# Altium PCB 走马灯PCB.PcbDoc
Units mil, origin at the board's own origin, x right, y up, seen from the top; angles counter-clockwise.
Board outline 3795.25 x 1812.03 mil, 2 copper layers (Top Layer, Bottom Layer); 29 components, 23 nets, 97 pads, 0 vias.
Unrouted connection lines stored in the file: 12.
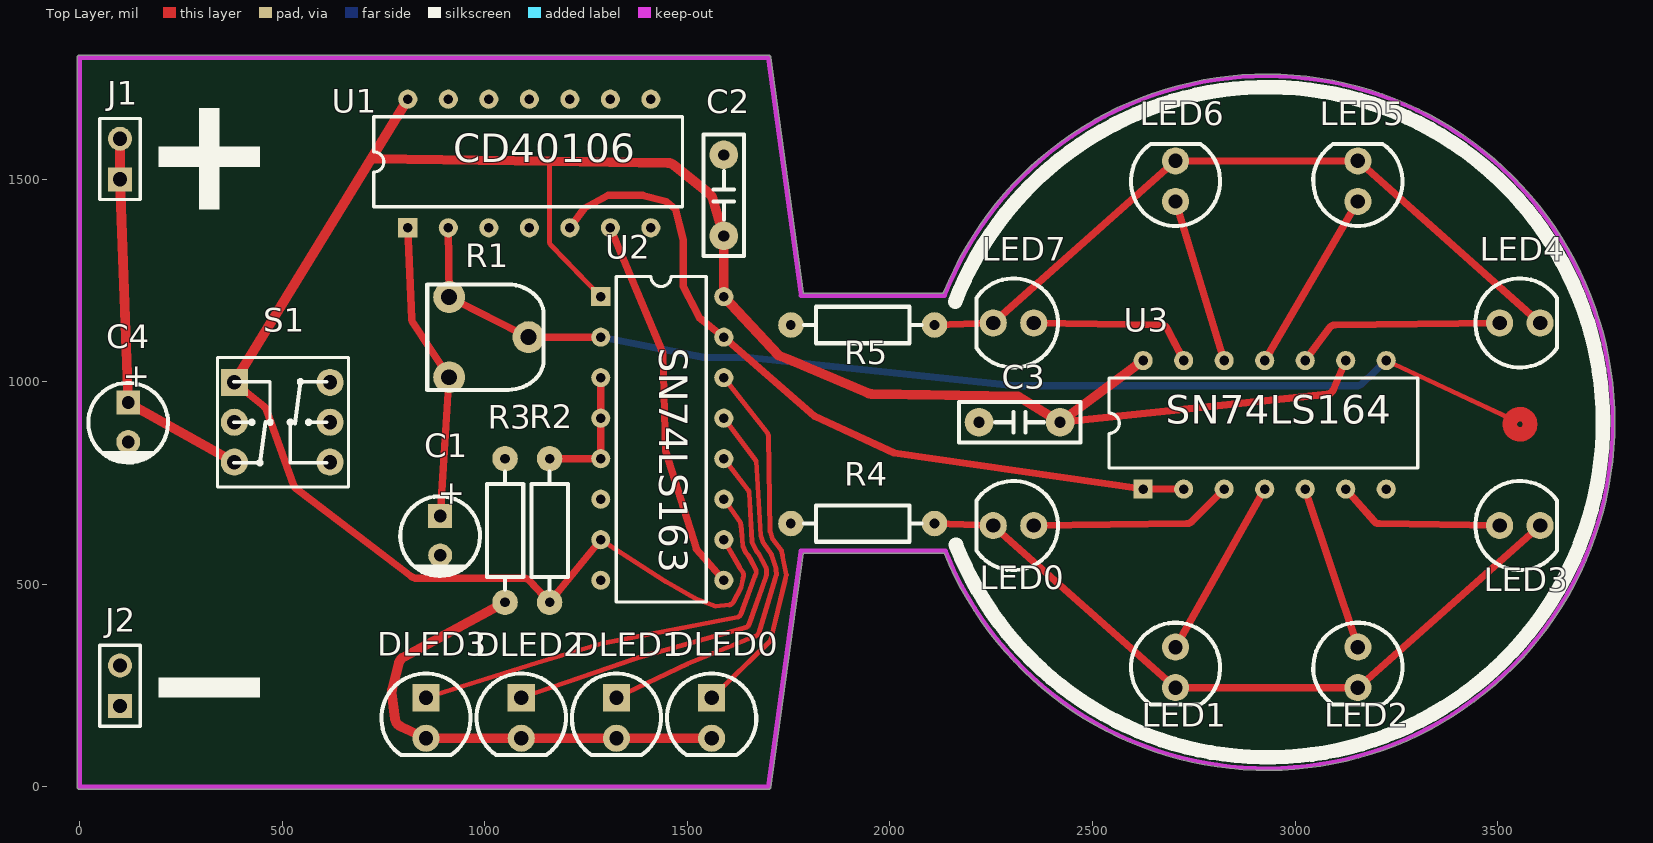
[diagram p0: Top Layer view]
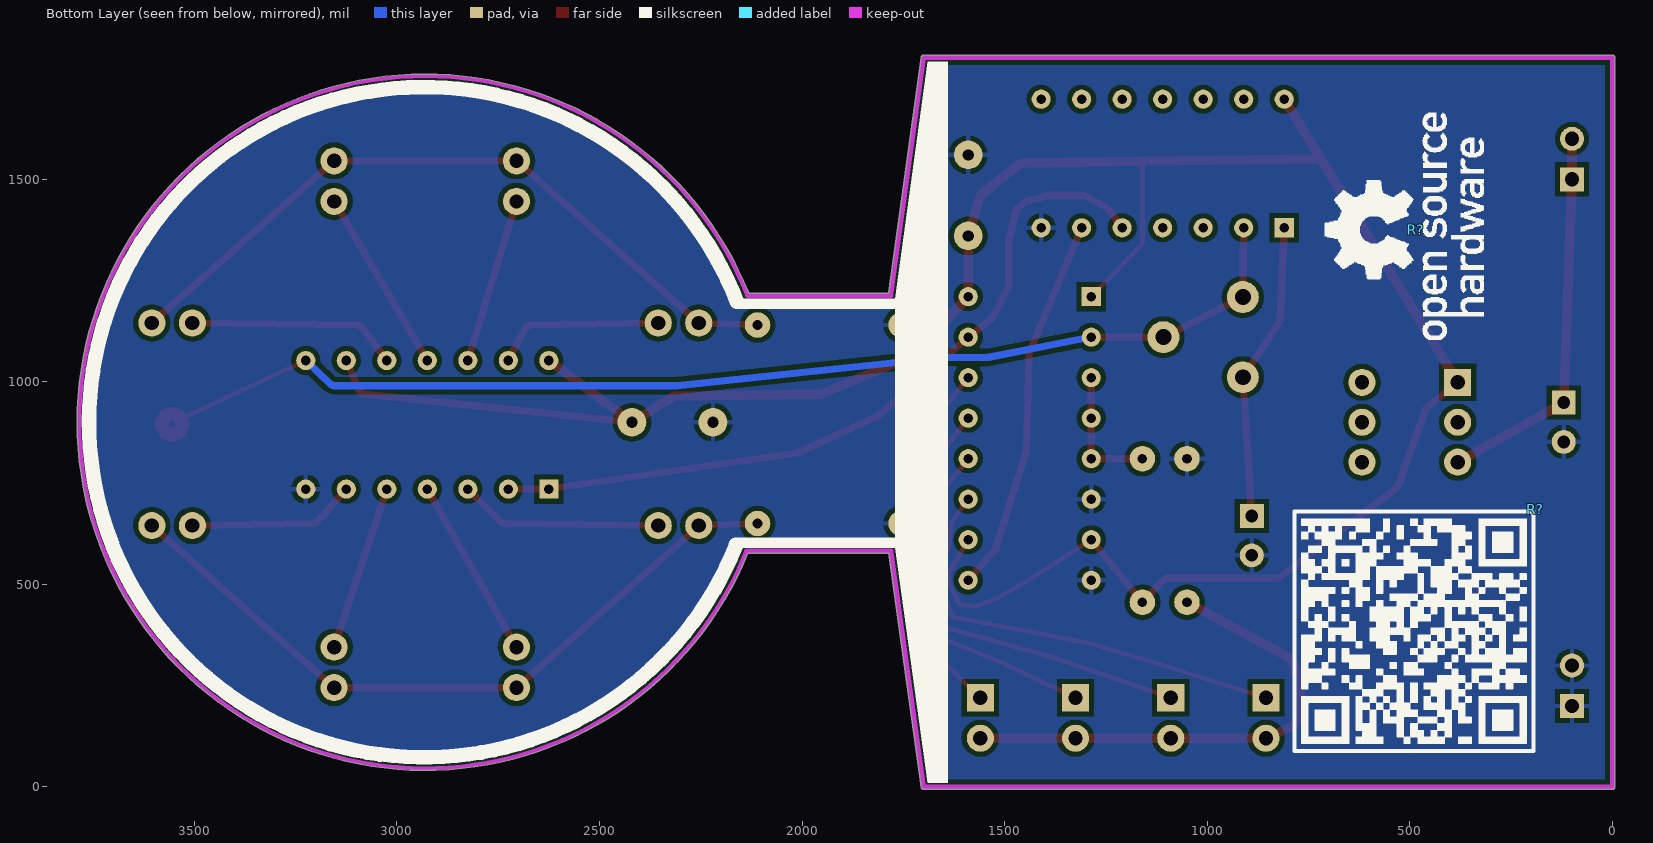
[diagram p1: Bottom Layer view, seen from below]
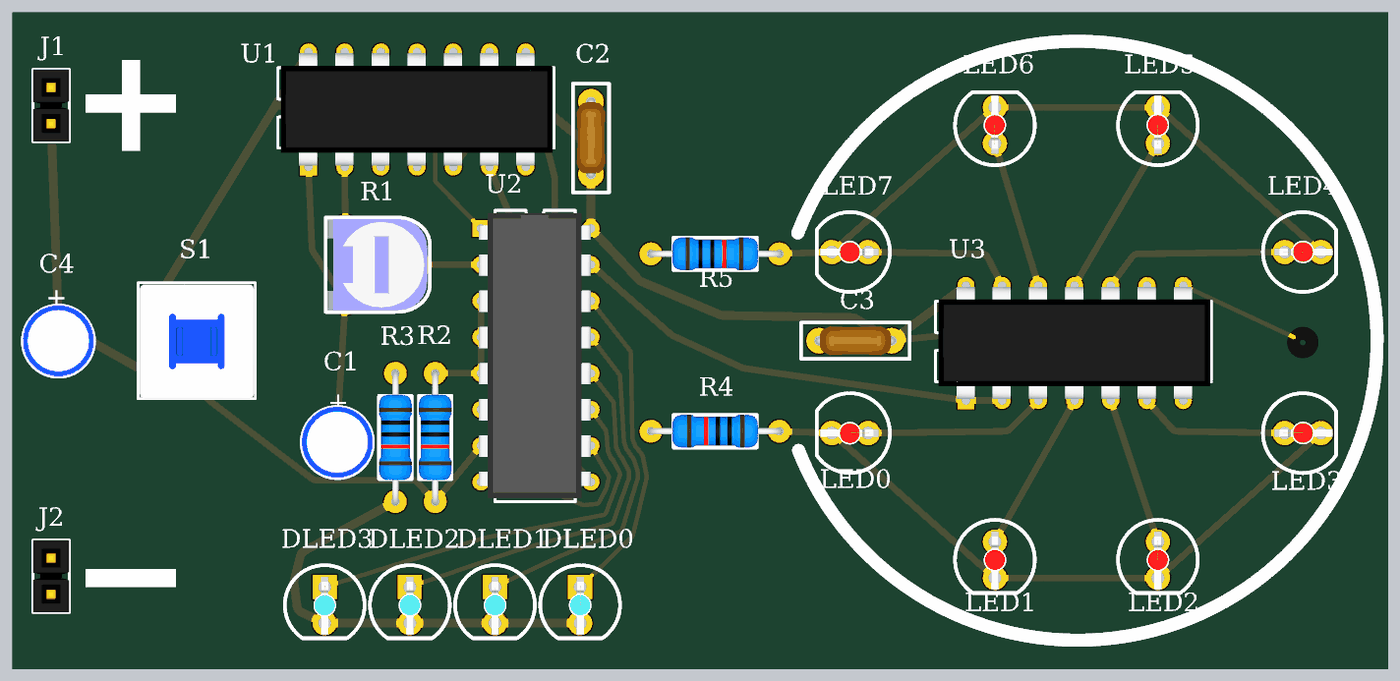
[diagram p2: 3D render of the assembled board from above, using the file's embedded part models]

## Layer stack, top to bottom
Top Solder: solder mask 0.4, Solder Resist, Dk 3.5
Top Layer: signal copper 1.4
Dielectric 1: dielectric 12.6, FR-4, Dk 4.8
Bottom Layer: signal copper 1.4
Bottom Solder: solder mask 0.4, Solder Resist, Dk 3.5

## Board outline
-6.01,0 ccw(c0,0) 0,-6.01 1700,-6.01 ccw(c1700,0) 1705.96,-0.82 1785.62,576.73 2133.89,576.73 ccw(c2930,900) 3789.24,900 ccw(c2930,900) 2132.15,1218.95 1785.92,1218.95 ccw(c1780,1220) 1786.02,1220 ccw(c1780,1220) 1785.96,1220.82 1705.96,1800.82 ccw(c1700,1800) 1700,1806.01 0,1806.01 ccw(c0,1800) -6.01,1800

## Design rules (kind name [scope] priority, off if disabled: settings)
AssemblyTestPointUsage [All] p1 off:
AssemblyTestpoint [All] p1 off: testpointundercomponent=TRUE minsize=40 maxsize=100 preferedsize=60 minholesize=0 maxholesize=40 preferedholesize=32 testpointgrid=1 usegrid=TRUE gridtolerance=0.01 allowsidetop=TRUE allowsidebottom=TRUE
Clearance [All] p1: gap=12 ignorepadtopadclearanceinfootprint=TRUE except(0: Arc-Text Track-Text SMDPad-Text THPad-Text Via-Text Fill-Text Poly-Text Region-Text Text-Text; 10: Arc-Arc Arc-Track Track-Track)
ComponentClearance [All] p1 off: gap=10 collisioncheckmode=3 verticalgap=10 showdistances=FALSE
FabricationTestPointUsage [All] p1 off: valid=0 allowmultiple=FALSE
FabricationTestpoint [All] p1 off: side=3 testpointundercomponent=TRUE minsize=40 maxsize=100 preferedsize=60 minholesize=0 maxholesize=40 preferedholesize=32 testpointgrid=1 allowsidetop=TRUE allowsidebottom=TRUE usegrid=TRUE gridtolerance=0.01
Height [All] p1 off: minheight=0 maxheight=1000 prefheight=500
HoleToHoleClearance [All] p1 off: gap=10 allowstackedmicrovias=TRUE
LayerPairs [All] p1 off: enforce=TRUE
MinimumSolderMaskSliver [All] p1 off: minsoldermaskwidth=10
NetAntennae [All] p1 off: netantennaetolerance=0
PasteMaskExpansion [All] p1 off: expansion=0
PolygonConnect [All] p1: connectstyle=Relief reliefconductorwidth=12 reliefentries=4 polygonreliefangle="90 Angle" airgapwidth=12
RoutingVias [All] p1: holewidth=28 width=50 viastyle="Through Hole" minholewidth=28 minwidth=50 maxholewidth=28 maxwidth=50
SilkToSilkClearance [All] p1 off: silktosilkclearance=10
SilkToSolderMaskClearance [IsPad] p1 off: minsilkscreentomaskgap=10 clearancetoexposedcopper=TRUE
SolderMaskExpansion [All] p1 off: expansion=4 istentingtop=FALSE
Width [All] p1: maxlimit=36 minlimit=12 preferedwidth=18
17 further rules are at their usual default settings.

## Classes and differential pairs
component class 走马灯SCH: C1 C2 C3 C4 DLED0 DLED1 DLED2 DLED3 J1 J2 LED0 LED1 LED2 LED3 LED4 LED5 LED6 LED7 R1 R2 R3 R4 R5 S1 U1 U2 U3

## Components (designator, comment, footprint, x,y, rotation, side; value= is the part's Value field where it differs from the comment)
C1 "1u/2.2u/10u" C5X8 890,620 r270 top
C2 "100n" MLCC5.08-A 1590,1460 r270 top
C3 "100n" MLCC5.08-A 2320,900 r0 top
C4 "1u/2.2u/10u" C5X8 120,900 r270 top
DLED0 "D-LED" "LED 5MM-Y" 1560,170 r270 top
DLED1 "D-LED" "LED 5MM-Y" 1325,170 r270 top
DLED2 "D-LED" "LED 5MM-Y" 1090,170 r270 top
DLED3 "D-LED" "LED 5MM-Y" 855,170 r270 top
J1 "MHDR" HDR1X2 100,1500 r90 top
J2 "MHDR" HDR1X2 100,200 r90 top
LED0 "LED" "LED 5MM-R" 2305,645 r180 top
LED1 "LED" "LED 5MM-R" 2705,295 r270 top
LED2 "LED" "LED 5MM-R" 3155,295 r270 top
LED3 "LED" "LED 5MM-R" 3555,645 r0 top
LED4 "LED" "LED 5MM-R" 3555,1145 r0 top
LED5 "LED" "LED 5MM-R" 3155,1495 r90 top
LED6 "LED" "LED 5MM-R" 2705,1495 r90 top
LED7 "LED" "LED 5MM-R" 2305,1145 r180 top
R1 "105/504/104" "RES ADJ3" 1010,1110 r0 top
R2 "10K" "RS 1/4W" 1160,632.83 r270 top
R3 "200" "RS 1/4W" 1050,632.83 r270 top
R4 "200" "RS 1/4W" 1932.83,650 r180 top
R5 "200" "RS 1/4W" 1932.83,1140 r0 top
R? "Comment" "OPEN SOURCE" 485,1375 r90 bottom locked
R? "Comment" "my Github" 190,685 r0 bottom locked
S1 "SW DPDT" "KFT DIP-8X8" 500,900 r270 top
U1 "40106" DIP14 810,1380 r90 top
U2 "SN74LS163A" DIP16 1286.3,1210 r0 top
U3 "SN74LS164" DIP14 2625,735 r90 top

## Footprints (in the part's own frame and the unit in brackets; to place one, negate y for a bottom-side part, rotate by r counter-clockwise, add the part's x,y. Pads: shape width x height; smd on the part's side, far side on the other; paste and mask are expansions set on the pad)
C5X8 [mm] "RB.1/.2"
  rect 1.5x1.5 hole 0.8: 1(-1.231,0)
  round 1.5 hole 0.8: 2(1.231,0)
  silkscreen extent -2.47,-2.5 2.53,2.5, body extent -2.5,-2.5 2.5,2.49, height 8.13
DIP14 [mm]
  rect 1.2x1.2 hole 0.6: 1(0,0)
  round 1.2 hole 0.6: 2(0,-2.54) 3(0,-5.08) 4(0,-7.62) 5(0,-10.16) 6(0,-12.7) 7(0,-15.24) 8(8.062,-15.24) 9(8.062,-12.7) 10(8.062,-10.16) 11(8.062,-7.62) 12(8.062,-5.08) 13(8.062,-2.54) 14(8.062,0)
  silkscreen extent 1.32,-17.22 6.96,2.13, body extent 0.1,-17.12 7.98,1.93, height 4.19
DIP16 [mm]
  rect 1.2x1.2 hole 0.6: 1(0,0)
  round 1.2 hole 0.6: 2(0,-2.54) 3(0,-5.08) 4(0,-7.62) 5(0,-10.16) 6(0,-12.7) 7(0,-15.24) 8(0,-17.78) 9(7.714,-17.78) 10(7.714,-15.24) 11(7.714,-12.7) 12(7.714,-10.16) 13(7.714,-7.62) 14(7.714,-5.08) 15(7.714,-2.54) 16(7.714,0)
  silkscreen extent 0.97,-19.15 6.61,1.27, body extent -0.17,-18.92 7.7,1.08, height 5.08
HDR1X2 [mm]
  rect 1.5x1.5 hole 0.9: 1(-0.01,0.007)
  round 1.5 hole 0.9: 2(2.53,0.007)
  silkscreen extent -1.28,-1.26 3.8,1.28, body extent -1.28,-1.26 3.8,1.28, height 8.41
"KFT DIP-8X8" [mm] "自锁开关，规格：8*8mm"
  rect 1.7x1.7 hole 0.9: 1(-2.5,-3)
  round 1.7 hole 0.9: 2(0,-3) 3(2.5,-3) 4(2.5,3) 5(0,3) 6(-2.5,3)
  silkscreen extent -4.06,-4.06 4.06,4.15, body extent -3.95,-3.95 4.05,4.05, height 13.1
"LED 5MM-R" [mm] "红色5mm直插LED  淘宝ID:黄晶宝石"
  round 1.7 hole 0.9: 1(-1.27,0) 2(1.27,0)
  silkscreen extent -2.8,-2.8 2.33,2.8, body extent -2.85,-2.85 2.45,2.85, height 8.75
"LED 5MM-Y" [mm] "黄色5mm直插LED                       淘宝ID:黄晶宝石"
  rect 1.7x1.7 hole 0.9: 1(-1.27,0)
  round 1.7 hole 0.9: 2(1.27,0)
  silkscreen extent -2.8,-2.8 2.33,2.8, body extent -2.85,-2.85 2.45,2.85, height 8.75
MLCC5.08-A [mm] "独石电容，脚距5.08mm"
  round 1.8 hole 0.7: 1(-2.54,0) 2(2.54,0)
  silkscreen extent -3.81,-1.27 3.81,1.27, body extent -2.79,-1 2.79,1, height 3.71
"my Github" [mil]
  silkscreen extent 5,5 595,596
"OPEN SOURCE" [mil]
  silkscreen extent -271,-168 289,224
"RES ADJ3" [mm]
  round 2 hole 1: 1(-2.489,-2.515) 2(2.489,0) 3(-2.489,2.515)
  silkscreen extent -3.86,-3.31 3.44,3.3, body extent -3.75,-3.2 3.25,3.2, height 7.5
"RS 1/4W" [mm] "直插色环电阻，脚距9mm，直径2.3mm"
  round 1.6 hole 0.6: 1(-4.5,0) 2(4.5,0)
  silkscreen extent -3.68,-1.14 3.68,1.14, body extent -4.72,-1.16 4.73,1.16, height 2.32

## Part data
C1 C4: library part CAP-E, "电解电容"
C2 C3: library part CAP-M, "独石电容"
DLED0 DLED1 DLED2 DLED3: "LED"
J1 J2: library part MHDR1x2, "MHDR1x2"
R1: library part R-GLIDE
R2: library part R-10K, "resistor"
R3 R4 R5: library part R-200, "resistor"
S1: "Switch", LatestRevisionDate=17-Jul-2002, LatestRevisionNote="Re-released for DXP Platform.", PackageReference=SOT23-6, Published=24-Mar-1999, Publisher="Altium Limited"
U1: library part CD40106
U2: "SYN 4-BIT CNT"
U3: "8-BIT PALL SERI SFT REG"

## Nets (pads, with @x,y where several pads share a name; then routed paths per layer and width w, separated by ;. In a path a pad name is that pad's centre, name@x,y a point inside that pad or via, vN(x,y) a via of type N, cw(c..) or ccw(c..) an arc to the next point about the centre after c; other vN are vias at no path point)
+5: C2.2 C3.2 R2.2 S1.1 U1.14 U2.1 U2.7 U2.10 U2.16 U3.9 U3.14 | length 6057.7
  Top Layer w12: 1160,1344.82 ccw(c1172,1344.87) 1163.39,1336.51 U2.1 ; 1160,1344.87 1159.99,1544.1 ; U2.7 1446.33,507.07 1517.7,466 1569.9,445.99 1603.63,449.36 ccw(c1602.46,461.31) 1613.02,455.62 1632.97,492.7 1634.46,499.55 1638.92,520.04 ccw(c1627.2,522.62) 1637.23,529.21 ; U2.10 1629.18,541.44 1637.22,529.22
  Top Layer w18: S1.1 456.07,938.19 cw(c444.75,924.19) 461.69,930.29 ; 461.7,930.27 528.2,745.01 ccw(c545.14,751.09) 534.23,736.77 820.13,518.71 ccw(c831.08,533) 831.08,515 1097.14,515 cw(c1097.14,497) 1110.33,509.25 R2.2 U2.7 ; C3.2 3079.45,968.9 ; 3079.49,968.9 ccw(c3077.58,986.8) 3094.16,979.79 U3.9
  Top Layer w24: S1.1 719.8,1550.12 ; U1.14 719.8,1550.12 ; 1451.77,1540.11 1159.99,1544.1 719.8,1550.12 ; 1451.78,1540.11 cw(c1451.44,1516.11) 1466.49,1534.81 1554.16,1464.68 ; 1554.16,1464.67 cw(c1539.16,1445.93) 1562.16,1452.8 C2.2 U2.16 1725.39,1064.94 1750.64,1054.27 1945.71,971.81 ; 1945.76,971.79 ccw(c1955.06,993.92) 1954.65,969.92 2316.22,963.86 C3.2 U3.14
CLK: R1.2 R1.3 U1.2 U2.2 U3.8 | length 3034.2
  Top Layer w12: U3.8 3530,910
  Top Layer w18: U1.2 R1.3 R1.2 U2.2
  Top Layer w36: 3580,895 ccw(c3555,895) 3580,895
  Bottom Layer w18: U2.2 1538.28,1060.34 ccw(c1541.76,1078) 1541.76,1060 1649.05,1060 cw(c1649.05,1042) 1650.97,1059.9 2309.05,990.1 ccw(c2310.95,1008) 2310.95,990 3152.76,990 ccw(c3152.76,1008) 3165.22,995.01 U3.8
GND: C1.2 C2.1 C3.1 C4.2 J2.1 J2.2 R3.1 R4.2 R5.1 U1.7 U2.6 U2.8 U3.7
NetC1_1: C1.1 R1.1 U1.1 | length 739.9
  Top Layer w18: U1.1 819.78,1154.99 819.79,1154.93 ccw(c837.77,1155.77) 822.76,1145.84 R1.1 C1.1
NetDLED0_1: DLED0.1 U2.14 | length 903.4
  Top Layer w12: DLED0.1 1702.49,357.57 ccw(c1694.15,366.21) 1705.82,363.42 1740.92,509.28 1744.32,523.39 1734.49,572.38 1732.24,583.62 1711.32,611.01 1704.29,629.99 1700.07,865.92 ccw(c1688.07,865.76) 1697.52,873.16 U2.14
NetDLED0_2: DLED0.2 DLED1.2 DLED2.2 DLED3.2 R3.2 | length 1242.8
  Top Layer w24: R3.2 799.3,320.03 ccw(c810.72,298.92) 787.44,304.74 771.09,239.35 ccw(c794.37,233.53) 770.56,230.55 778.35,168.16 ccw(c802.17,171.14) 792.02,149.4 DLED3.2 DLED2.2 DLED1.2 DLED0.2
NetDLED1_1: DLED1.1 U2.13 | length 960.3
  Top Layer w12: DLED1.1 1500.7,303.53 1669.72,372.83 ccw(c1665.17,383.94) 1676.66,380.5 1716.54,512.26 1719.79,523 1718.71,538.21 ccw(c1706.74,537.38) 1718.14,541.13 1709.57,567.06 1707.36,573.75 1687.6,601.83 1681.17,620.07 1670,805 U2.13
NetDLED2_1: DLED2.1 U2.12 | length 1039.4
  Top Layer w12: DLED2.1 1380.18,319.49 1644.02,393.33 ccw(c1640.78,404.88) 1652.09,400.87 1693.58,517.35 ccw(c1683,523.01) 1695,523.01 1695,536.95 ccw(c1683,537) 1693.6,542.63 1684.29,560.08 1676.09,575.45 1670.72,581.74 1659.45,604.97 1652.71,726.06 ccw(c1640.73,725.43) 1650.2,732.79 U2.12
NetDLED3_1: DLED3.1 U2.11 | length 1119.9
  Top Layer w12: DLED3.1 1129.61,306.24 1294.89,355.37 1623.36,418.72 ccw(c1621.09,430.5) 1632.36,426.38 1666.78,519.56 1670,528.29 1670,531.93 ccw(c1658,531.98) 1668.58,537.64 ; U2.11 1631.36,652.09 1633.42,635.1 1636.74,595.14 1644.1,577.68 1650.65,571.04 1653.91,564.97 1668.57,537.66
NetLED0_1: LED0.1 U3.3 | length 504.5
  Top Layer w18: LED0.1 2732.68,649.9 2732.73,649.91 ccw(c2732.45,667.9) 2745.18,655.18 U3.3
NetLED0_2: LED0.2 LED1.2 LED2.2 LED3.2 R4.1 | length 1799.2
  Top Layer w18: R4.1 LED0.2 LED1.2 LED2.2 LED3.2
NetLED1_1: LED1.1 U3.4 | length 447.8
  Top Layer w18: LED1.1 U3.4
NetLED2_1: LED2.1 U3.5 | length 411.1
  Top Layer w18: U3.5 LED2.1
NetLED3_1: LED3.1 U3.6 | length 417.5
  Top Layer w18: U3.6 3194.78,655.91 ccw(c3208.24,667.87) 3207.94,649.87 LED3.1
NetLED4_1: LED4.1 U3.10 | length 522.8
  Top Layer w18: U3.10 3084.68,1132.83 cw(c3099.14,1122.11) 3098.92,1140.11 LED4.1
NetLED4_2: LED4.2 LED5.2 LED6.2 LED7.2 R5.2 | length 1799.2
  Top Layer w18: R5.2 LED7.2 LED6.2 LED5.2 LED4.2
NetLED5_1: LED5.1 U3.11 | length 455
  Top Layer w18: U3.11 LED5.1
NetLED6_1: LED6.1 U3.12 | length 410.5
  Top Layer w18: LED6.1 U3.12
NetLED7_1: LED7.1 U3.13 | length 421.4
  Top Layer w18: LED7.1 2669.2,1140.17 cw(c2668.92,1122.17) 2684.96,1130.34 U3.13
NetR2_1: R2.1 U2.3 U2.4 U2.5 | length 326.3
  Top Layer w18: R2.1 U2.5 U2.4 U2.3
NetU1_5: U1.5 U2.15 U3.1 U3.2 | length 1893.3
  Top Layer w18: U1.5 1246.6,1428.8 1305,1460 1390,1460 1448.69,1444.43 1470.82,1425.98 1490,1350 1490,1235 1529.02,1158.78 U2.15 1814.15,914.77 2010.58,823.99 U3.1 U3.2
NetU1_6: U1.6 U2.9 | length 933.3
  Top Layer w18: U1.6 1438.69,1073.12 cw(c1422.09,1066.16) 1440.09,1066.56 1446,830.03 1522.14,587.55 U2.9
VIN: C4.1 J1.1 J1.2 S1.3 | length 951.8
  Top Layer w24: J1.2 J1.1 C4.1 S1.3
pads on no net: S1.2 S1.4 S1.5 S1.6 U1.3 U1.4 U1.8 U1.9 U1.10 U1.11 U1.12 U1.13

## Polygon pours and split planes (outlines as drawn)
GND on Bottom Layer "GND" (solid, remove dead copper, pour order 0): 0,1800 0,0 3785,0 3785,1800

## Keep-outs
Keep-Out Layer:
  lines w10: 2135.16,1212.93 cw(c2930,900) 2136.87,582.75
  lines w12: 1780,580 1700,0 0,0 0,1800 1700,1800 1780,1220 ; 1780,582.75 2136.87,582.75 ; 1780,1212.93 2135.16,1212.93

## Silkscreen, mask and mechanical layers (free items; w line width, h text height)
Top Overlay:
  rectangle: 195,1530 445,1580
  region: 345,1425 345,1675 295,1675 295,1425
  rectangle: 195,220 445,270
  lines w36: 2161.03,1197.67 cw(c2932.82,900.01) 2163.06,597.13
  text "CD40106" at 922.41,1517.67 h120
  text "SN74LS163" at 1407.67,1084.14 h120 r270
  text "SN74LS164" at 2681.02,872.67 h120
Bottom Overlay:
  rectangle: 1770,590 2165,615
  rectangle: 1770,1180 2165,1205
  region: 1770,1205 1690,1790 1640,1790 1640,10 1690,10 1770,590
  lines w36: 2161.03,1197.67 cw(c2932.82,900.01) 2163.06,597.13
Top Solder:
  circle w36: c3555,895 r25.5

## Text inside footprints (layer, text, board x,y; h text height)
C1: Top Overlay "+" at 873,756.53 h100 r270
C4: Top Overlay "+" at 95,1045 h100 r270